# EAGLE board takpad6.2 (EAGLE 8.4.1)
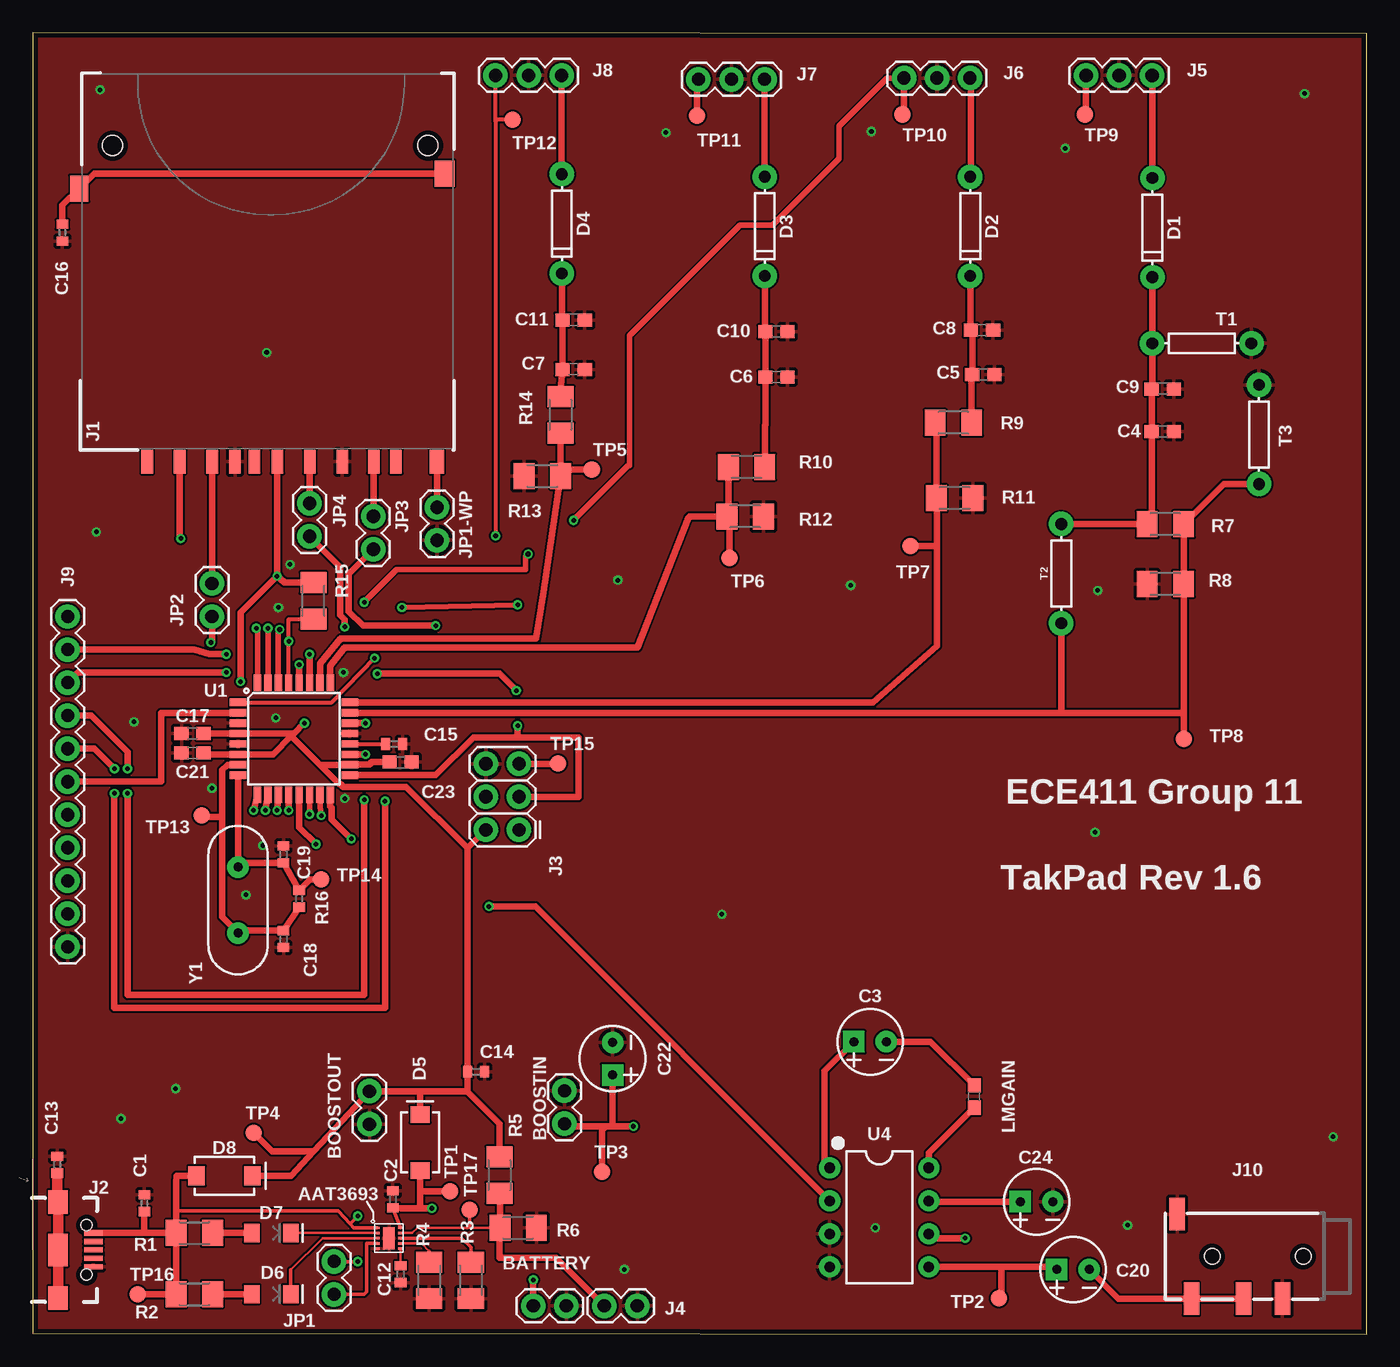
[diagram p0: board, top side]
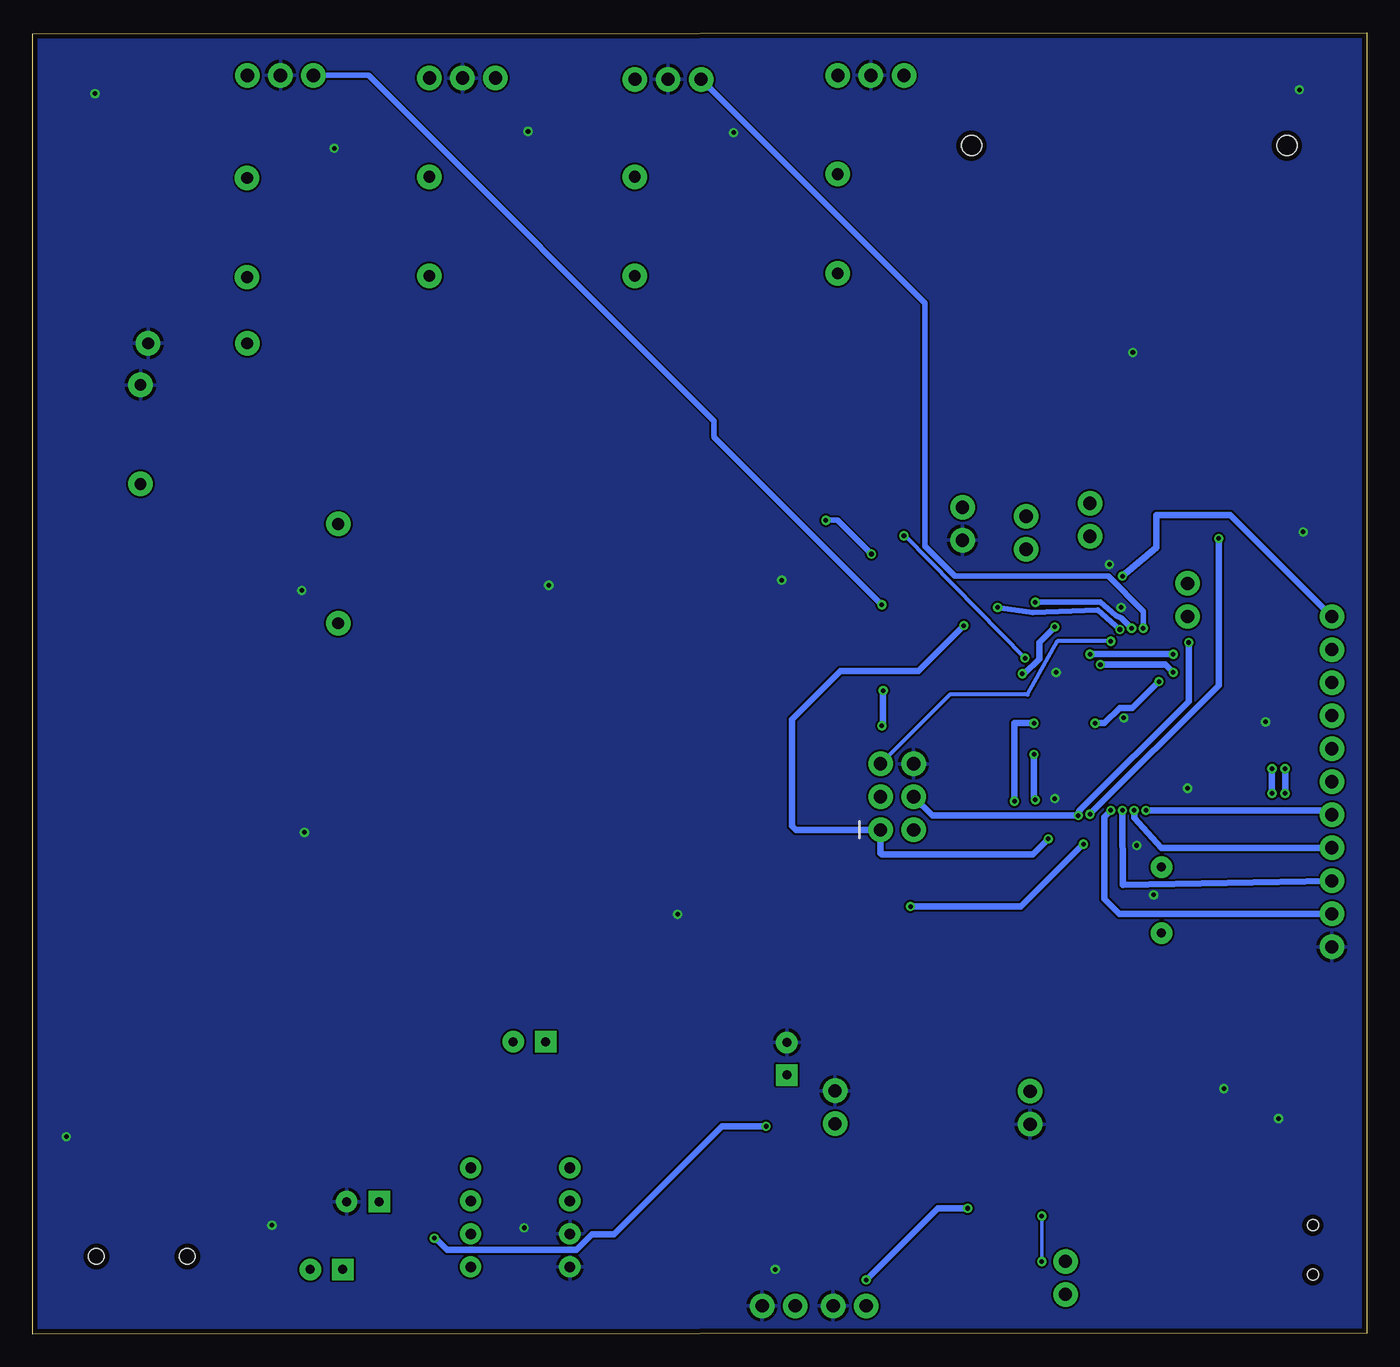
[diagram p1: board, bottom side, seen from below]

Size 102.6 x 100.1 mm. Coordinates in mm from the lower left corner, seen from the top.
Outline: 0,0.1 102.6,0 102.6,100 0,100.1 0,0.1
Copper layers (1*16): Top 0.0356mm / dielectric 1.5011mm / Bottom 0.0356mm
Design rules "LaenPCBOrder": minimum track width 6mil, minimum drill 13mil, track to track 6mil, track to pad 6mil, pad to pad 6mil, via to via 6mil, smd to smd 6mil, copper to edge 15mil, drill to drill 6mil, minimum pad ring 7mil, minimum via ring 7mil, stop-mask expansion 3mil, vias tented up to drill 0mil, thermal gap 10mil

## Footprints (pad centres in the part's own frame; a part is rotated, then mirrored left to right if it is on the bottom)
1X02 = drill 1.016 pad 1.88: 1 0,0; 2 2.54,0
C0402 = smd 0.7 x 0.9: 1 -0.65,0; 2 0.65,0
CPOL-RADIAL-2.5MM-5MM-KIT = drill 0.7 pad 1.651 square: 1 1.25,0 | drill 0.7 pad 1.651: 2 -1.25,0
0603 = smd 1.1 x 1: 1 -0.85,0; 2 0.85,0
DIODE-1N4148 = drill 0.9 pad 1.88: A -3.81,0; C 3.81,0
SMA-DIODE = smd 1.27 x 1.47: A -2.15,0; C 2.15,0
LED-1206 = smd 1.2 x 1.4: A -1.5,0; C 1.5,0
SD = smd 1.8 x 0.9: 1 -1,6.77; 2 -1,4.27; 3 -1,2.52; 4 -1,-0.73; 5 -1,-3.23; 6 -1,-5.73; 7 -1,-8.15; 8 -1,-9.85; 9 -1,9.27; CD -1,1.02 | smd 2 x 1.4: SH@1 20,14.496 | smd 2 x 1.527: SH@2 21.15,-13.589 | smd 1.8 x 1.1: WP -1,-13 | hole 1.55: 23.3,11.94; 23.3,-12.32
USB-B-MICRO-SMD_RED_PASTE = smd 1.45 x 0.4: D+ 2.725,0; D- 2.725,0.65; GND 2.725,-1.3; ID 2.725,-0.65; VBUS 2.725,1.3 | smd 1.5 x 1.8: SHIELD1 0,3.685; SHIELD2 0,-3.685 | smd 1.5 x 2.5: SHIELD3 0,0 | hole 0.85: 2.2,1.9; 2.2,-1.9
2X3 = drill 1.016 pad 1.88: 1 0,0; 2 0,2.54; 3 2.54,0; 4 2.54,2.54; 5 5.08,0; 6 5.08,2.54
1X03 = drill 1.016 pad 1.88: 1 0,0; 2 2.54,0; 3 5.08,0
1X11 = drill 1.016 pad 1.88: 1 0,0; 2 2.54,0; 3 5.08,0; 4 7.62,0; 5 10.16,0; 6 12.7,0; 7 15.24,0; 8 17.78,0; 9 20.32,0; 10 22.86,0; 11 25.4,0
AUDIO_JACK_3.5MM_TRRS_SMD_RA = smd 1.2 x 2.5: EARTH 11.3,-3.25; RING1 6.2,3.25; RING2 3.2,3.25; TIP 10.2,3.25 | hole 1.2: 1.6,0; 8.6,0
M1206 = smd 1.6 x 2: 1 -1.4,0; 2 1.4,0
R0402 = smd 0.7 x 0.9: 1 -0.65,0; 2 0.65,0
AXIAL-0.3 = drill 0.9 pad 1.88: P$1 -3.81,0; P$2 3.81,0
B1,27 = smd 1.27 x 1.27: TP 0,0
TQFP32-08 = smd 1.27 x 0.559: 1 -4.293,2.8; 2 -4.293,2; 3 -4.293,1.2; 4 -4.293,0.4; 5 -4.293,-0.4; 6 -4.293,-1.2; 7 -4.293,-2; 8 -4.293,-2.8; 17 4.293,-2.8; 18 4.293,-2; 19 4.293,-1.2; 20 4.293,-0.4; 21 4.293,0.4; 22 4.293,1.2; 23 4.293,2; 24 4.293,2.8 | smd 0.559 x 1.27: 9 -2.8,-4.293; 10 -2,-4.293; 11 -1.2,-4.293; 12 -0.4,-4.293; 13 0.4,-4.293; 14 1.2,-4.293; 15 2,-4.293; 16 2.8,-4.293; 25 2.8,4.293; 26 2,4.293; 27 1.2,4.293; 28 0.4,4.293; 29 -0.4,4.293; 30 -1.2,4.293; 31 -2,4.293; 32 -2.8,4.293
DIP08 = drill 0.813 pad 1.626: 1 -3.81,-3.81; 2 -1.27,-3.81; 3 1.27,-3.81; 4 3.81,-3.81; 5 3.81,3.81; 6 1.27,3.81; 7 -1.27,3.81; 8 -3.81,3.81
IDH-AA-T1 = smd 0.4 x 0.18: BAT 0.9,0.8; CT 0.9,-0.8; EN -0.9,-0.4; GND -0.9,-0.8; ISET 0.9,-0.4; STAT1 -0.9,0.4; STAT2 -0.9,0; TERM 0.9,0; TS 0.9,0.4; VIN -0.9,0.8 | smd 0.9 x 1.7: EP 0,0
HC49US = drill 0.7 pad 1.651: 1 -2.54,0; 2 2.54,0

## Placement (x,y rotation side)
BATTERY  [1X02]  41.04,2.2 180 top
BOOSTIN  [1X02]  40.9,16.2 90 top
BOOSTOUT  [1X02]  25.9,18.7 270 top
C1  10u  [C0402]  8.6,10.1 90 top
C2  10u  [C0402]  27.7,10.4 270 top
C3  10uF  [CPOL-RADIAL-2.5MM-5MM-KIT]  64.4,22.5 180 top
C4  47pF  [0603]  86.9,69.4 0 top
C5  47pF  [0603]  73.1,73.8 0 top
C6  47pF  [0603]  57.2,73.6 0 top
C7  47pF  [0603]  41.6,74.2 0 top
C8  1uF  [0603]  73,77.2 0 top
C9  1uF  [0603]  86.9,72.7 0 top
C10  1uF  [0603]  57.2,77.1 0 top
C11  1uF  [0603]  41.6,78 0 top
C12  0.1u  [C0402]  28.3,4.64 270 top
C13  0.1u  [C0402]  1.9,13.06 90 top
C14  10u  [C0402]  34.1,20.2 0 top
C15  0.1u  [C0402]  27.8,45.4 0 top
C16  0.1u  [C0402]  2.3,84.7 270 top
C17  1uF  [0603]  12.3,46.2 0 top
C18  22pF  [C0402]  19.3,30.4 90 top
C19  22pF  [C0402]  19.3,36.9 90 top
C20  10uF  [CPOL-RADIAL-2.5MM-5MM-KIT]  80,5 180 top
C21  1uF  [0603]  12.3,44.7 0 top
C22  10uF  [CPOL-RADIAL-2.5MM-5MM-KIT]  44.6,21.2 270 top
C23  1uF  [0603]  28.3,44 180 top
C24  0.1uF  [CPOL-RADIAL-2.5MM-5MM-KIT]  77.2,10.2 180 top
D1  200mA/100V/1V  [DIODE-1N4148]  86.1,85.1 270 top
D2  200mA/100V/1V  [DIODE-1N4148]  72.1,85.2 270 top
D3  200mA/100V/1V  [DIODE-1N4148]  56.3,85.2 270 top
D4  200mA/100V/1V  [DIODE-1N4148]  40.7,85.4 270 top
D5  2A/40V/360mV  [SMA-DIODE]  29.8,14.76 90 top
D6  RED  [LED-1206]  18.36,3.1 0 top
D7  GREEN  [LED-1206]  18.36,7.8 0 top
D8  2A/40V/360mV  [SMA-DIODE]  14.76,12.2 0 top
J1  SD_CARD_SOCKET  [SD]  18.09,68.1 90 top
J2  [USB-B-MICRO-SMD_RED_PASTE]  1.96,6.5 0 top
J3  AVR_SPI_PROG_3X2PTH  [2X3]  37.4,38.8 90 top
J4  [1X02]  43.96,2.2 0 top
J5  [1X03]  81,96.8 0 top
J6  [1X03]  67,96.6 0 top
J7  [1X03]  51.2,96.5 0 top
J8  [1X03]  35.6,96.8 0 top
J9  [1X11]  2.7,55.2 270 top
J10  AUDIO_JACK_TRRSSMD_RA  [AUDIO_JACK_3.5MM_TRRS_SMD_RA]  99.3,6 180 top
JP1  [1X02]  23.18,3.08 90 top
JP1-WP  [1X02]  31.1,63.6 270 top
JP2  [1X02]  13.8,55.2 90 top
JP3  [1X02]  26.2,62.9 270 top
JP4  [1X02]  21.3,63.9 270 top
LMGAIN  1  [0603]  72.4,18.3 90 top
R1  1.5k  [M1206]  12.44,7.8 180 top
R2  1.5k  [M1206]  12.44,3.1 180 top
R3  13.3k  [M1206]  33.7,4.16 90 top
R4  1.87k  [M1206]  30.5,4.16 90 top
R5  10k  [M1206]  35.9,12.26 90 top
R6  10k  [M1206]  37.34,8.2 180 top
R7  470k  [M1206]  87.1,62.3 0 top
R8  150k  [M1206]  87.1,57.7 0 top
R9  470k  [M1206]  70.8,70.1 0 top
R10  470k  [M1206]  54.9,66.7 0 top
R11  150k  [M1206]  70.9,64.3 0 top
R12  150k  [M1206]  54.8,62.9 0 top
R13  150k  [M1206]  39.2,66 180 top
R14  470k  [M1206]  40.6,70.7 90 top
R15  10k  [M1206]  21.6,56.4 270 top
R16  1M  [R0402]  20.5,33.5 270 top
T1  0  [AXIAL-0.3]  89.9,76.2 180 top
T2  0  [AXIAL-0.3]  79.1,58.5 90 top
T3  0  [AXIAL-0.3]  94.3,69.2 270 top
TP1  TPB1,27  [B1,27]  32.1,11 0 top
TP2  TPB1,27  [B1,27]  74.3,2.8 0 top
TP3  TPB1,27  [B1,27]  43.8,12.5 0 top
TP4  TPB1,27  [B1,27]  17,15.5 0 top
TP5  TPB1,27  [B1,27]  43,66.5 0 top
TP6  TPB1,27  [B1,27]  53.6,59.7 0 top
TP7  TPB1,27  [B1,27]  67.5,60.6 0 top
TP8  TPB1,27  [B1,27]  88.5,45.8 0 top
TP9  TPB1,27  [B1,27]  80.9,93.8 0 top
TP10  TPB1,27  [B1,27]  66.9,93.8 0 top
TP11  TPB1,27  [B1,27]  51.1,93.7 0 top
TP12  TPB1,27  [B1,27]  36.9,93.4 0 top
TP13  TPB1,27  [B1,27]  13,39.9 0 top
TP14  TPB1,27  [B1,27]  22.2,35 0 top
TP15  TPB1,27  [B1,27]  40.4,43.9 0 top
TP16  TPB1,27  [B1,27]  8.1,3.1 0 top
TP17  TPB1,27  [B1,27]  33.6,9.6 0 top
U1  ATMEGA328P_TQFP  [TQFP32-08]  20.1,45.8 0 top
U4  LM386N  [DIP08]  65.1,9 270 top
U$1  AAT3693  [IDH-AA-T1]  27.4,7.4 0 top
Y1  20MHz  [HC49US]  15.8,33.4 270 top

## Library data of the parts
BATTERY BOOSTIN BOOSTOUT J3-J9 = SparkFun-Connectors
C1 C2 C12-C16 R1-R16 = rcl
C3 C20 C22 C24 = SparkFun-Capacitors; PROD_ID: CAP-08440
C4-C11 C17 C21 C23 = SparkFun-Capacitors; PROD_ID: CAP-08913
C18 C19 = resistor
D1-D4 = SparkFun-DiscreteSemi; PROD_ID: DIO-08378
D5 D8 = SparkFun-DiscreteSemi; PROD_ID: DIO-09886
D6 = SparkFun-LED; PROD_ID: DIO-09912
D7 = SparkFun-LED; PROD_ID: DIO-00862
J1 = SparkFun-Connectors; PROD_ID: CONN-11976; SF_ID: PRT-12769
J2 = SparkFun-Connectors; PROD_ID: CONN-11752
J10 = SparkFun-Connectors; PROD_ID: CONN-10676; SF_ID: PRT-12639
JP1 JP1-WP JP2-JP4 = SparkFun-Retired
LMGAIN = SparkFun-Resistors; PROD_ID: RES-08269
T1-T3 = SparkFun-Resistors; PROD_ID: RES-12182
TP1-TP17 = testpad
U1 = SparkFun-IC-Microcontroller; PROD_ID: IC-09069
U4 = SparkFun-IC-Amplifiers; PROD_ID: IC-10899
U$1 = AAT3693
Y1 = SparkFun-Clocks; PROD_ID: XTAL-08181; SF_ID: COM-00536

## Nets
ADC4: J9.2 U1.27
ADC5: J9.3 U1.28
ADC6: J9.4 U1.19
ADC7: J9.5 U1.22
AREF: C15.1 U1.20
AUDIOINPUT: U1.13 U4.2
AUDIOOUT: C20.1 TP2.TP U4.5
BAT: BATTERY.2 C2.2 D5.A TP1.TP U$1.BAT
BYPASS: C24.1 U4.7
CD/DAT3: J1.1 U1.14
CLK: J1.5 JP4.1
CMD: J1.2 JP2.2
CT: C12.1 U$1.CT
DAT0: J1.7 JP3.1
EN: JP1.1 U$1.EN
GND: BATTERY.1 BOOSTIN.2 BOOSTOUT.2 C1.2 C2.1 C4.2 C5.2 C6.2 C7.2 C8.2 C9.2 C10.2 C11.2 C12.2 C13.2 C14.2 C15.2 C16.2 C17.1 C18.1 C19.2 C21.1 C22.2 C23.1 C24.2 J1.3 J1.6 J2.GND J3.6 J4.2 J5.2 J6.2 J7.2 J8.2 J9.11 J10.EARTH J10.RING2 JP1-WP.2 R3.1 R4.1 R6.1 R8.1 R11.2 R12.2 R13.2 T1.P$1 T3.P$1 U1.3 U1.5 U1.21 U4.3 U4.4 U$1.EP U$1.GND
ISET: R4.2 U$1.ISET
MISO: J3.1 JP3.2 U1.16
MOSI: J3.4 JP2.1 U1.15
N$1: C20.2 J10.RING1 J10.TIP
N$7: C13.1 J2.SHIELD1 J2.SHIELD2 J2.SHIELD3
N$9: C3.1 U4.1
N$10: C3.2 LMGAIN.2
N$11: LMGAIN.1 U4.8
N$17: C16.1 J1.SH@1 J1.SH@2
PB6: C18.2 R16.2 TP13.TP U1.7 Y1.2
PB7: C19.1 R16.1 TP14.TP U1.8 Y1.1
PD4: J9.6 U1.2
PD5: J9.7 U1.9
PD6: J9.8 U1.10
PD7: J9.9 U1.11
PD8: J9.10 U1.12
RST: J3.5 R15.2 TP15.TP U1.29
SCK: J3.3 JP4.2 U1.17
SENS1LED: J5.1 TP9.TP U1.30
SENS2LED: J6.1 TP10.TP U1.31
SENS3LED: J7.1 TP11.TP U1.32
SENS4LED: J8.1 TP12.TP U1.1
SENSOR1: D1.A J5.3
SENSOR1IN: C4.1 C9.1 D1.C R7.1 T1.P$2 T2.P$2
SENSOR1OUT: R7.2 R8.2 T2.P$1 T3.P$2 TP8.TP U1.23
SENSOR2: D2.A J6.3
SENSOR2IN: C5.1 C8.1 D2.C R9.2
SENSOR2OUT: R9.1 R11.1 TP7.TP U1.24
SENSOR3: D3.A J7.3
SENSOR3IN: C6.1 C10.1 D3.C R10.2
SENSOR3OUT: R10.1 R12.1 TP6.TP U1.25
SENSOR4: D4.A J8.3
SENSOR4IN: C7.1 C11.1 D4.C R14.2
SENSOR4OUT: R13.1 R14.1 TP5.TP U1.26
STAT1: D7.C U$1.STAT1
STAT1LED: D7.A R1.1
STAT2: D6.C U$1.STAT2
STAT2LED: D6.A R2.1
TEMPSENSE: J4.1 R5.1 R6.2 TP17.TP U$1.TS
TERM: R3.2 U$1.TERM
UPCONVERTERINPUT: BOOSTIN.1 C22.1 TP3.TP U4.6
V+: BOOSTOUT.1 C14.1 C17.2 C21.2 C23.2 D5.C D8.C J1.4 J3.2 J9.1 R5.2 R15.1 TP4.TP U1.4 U1.6 U1.18
VIN: C1.1 D8.A J2.VBUS JP1.2 R1.2 R2.2 TP16.TP U$1.VIN
WP: J1.WP JP1-WP.1

## Tracks (layer width: path | path; a pad name or v marks a point on that pad's centre or on a via)
ADC4  (via drill 0.35)
  Top 0.508: J9.2 12.44,52.66 13.6,52.3 v14.9,52.3 | U1.27 v21.3,52.3
  Bottom 0.508: v21.3,52.3 v14.9,52.3
ADC5  (via drill 0.35)
  Top 0.508: v14.9,50.9 3.48,50.9 J9.3 | U1.28 v20.5,51.5
  Bottom 0.508: v14.9,50.9 15.5,51.5 v20.5,51.5
ADC6  (via drill 0.35)
  Top 0.508: U1.19 v25.6,44.6 | v25.5,41.1 25.5,26.1 7.3,26.1 v7.3,41.6 | v7.3,43.5 7.3,44.8 4.52,47.58 J9.4
  Bottom 0.508: v25.6,44.6 25.6,41.2 v25.5,41.1 | v7.3,43.5 v7.3,41.6
ADC7  (via drill 0.35)
  Top 0.508: U1.22 v25.6,47 | v27.1,41 27.1,25.1 6.3,25.1 v6.3,41.6 | v6.3,43.5 4.76,45.04 J9.5
  Bottom 0.508: v25.6,47 27.1,47 v27.1,41 | v6.3,43.5 v6.3,41.6
AREF
  Top 0.305: U1.20 C15.1
AUDIOINPUT  (via drill 0.35)
  Top 0.508: U4.2 38.66,32.9 v35.1,32.9 | v21.8,37.7 20.5,39 U1.13
  Bottom 0.508: v21.8,37.7 26.6,32.9 v35.1,32.9
AUDIOOUT
  Top 0.508: U4.5 74.5,5.19 | 74.5,5.19 78.56,5.19 C20.1 | 74.5,5.19 74.5,3 TP2.TP
BAT  (via drill 0.35)
  Top 0.254: U$1.BAT C2.2
  Top 0.508: 29.8,11 29.8,9.7 | 29.8,11 D5.A | 29.8,9.7 28.35,9.7 C2.2 | v30.7,9.7 29.8,9.7 | v38.5,4.2 BATTERY.2 | TP1.TP 29.8,11
  Bottom 0.508: v30.7,9.7 33,9.7 v38.5,4.2
BYPASS
  Top 0.508: C24.1 68.98,10.2 U4.7
CD/DAT3  (via drill 0.35)
  Top 0.406: v21.3,40 U1.14
  Top 0.508: J1.1 11.32,61.28 v11.4,61.2
  Bottom 0.508: v11.4,61.2 11.4,49.9 v21.3,40
CLK
  Top 0.508: JP4.1 21.32,63.92 J1.5
CMD
  Top 0.508: J1.2 13.82,57.76 JP2.2
CT
  Top 0.203: U$1.CT C12.1
DAT0
  Top 0.508: JP3.1 26.24,62.94 J1.7
EN
  Top 0.254: JP1.1 25.48,3.08 25.7,3.3 25.7,7 U$1.EN
GND  (via drill 0.35)
  other vias: 18.7,47.4 13.8,42 19.8,59.2 53,32.3 45.5,5 18.9,55.9 81.9,57.2 62.9,57.6 45,58 18,75.5 100,15.2 64.8,8.2 84.2,8.4 11,18.9 6.8,16.6 48.7,92.4 64.5,92.5 79.4,91.2 16.4,33.8 17.7,37.6 7.8,47.1 4.9,61.7 97.8,95.4 5.2,95.7 23.9,50.9 24,41.2 81.7,38.6
  pour Top: 8.6,100 0.1,100.1 0.2,0.2 2.6,0.3 102.5,0.1 102.5,4.7 102.3,100 87.1,99.9
  pour Bottom: 0.1,100.1 0.1,0.2 8.7,0.3 102.4,0.1 102.5,0.8 102.3,99.9 5.7,100.1
ISET
  Top 0.203: U$1.ISET 29.9,7 30.5,6.4
  Top 0.254: 30.5,6.4 R4.2
MISO  (via drill 0.35)
  Top 0.508: U1.16 22.9,40.6 23,40.5 23,39.6 v24.5,38.1 | v31,54.5 25.4,54.5 24.3,55.6 24.3,58.46 JP3.2
  Bottom 0.508: v24.5,38.1 25.7,36.9 37.3,36.9 37.4,37 J3.1 43.9,38.8 44.2,39.1 44.2,47.3 40.5,51 34.5,51 v31,54.5
MOSI  (via drill 0.35)
  Top 0.406: v22.2,39.9 22.1,40.61 U1.15
  Top 0.508: JP2.1 13.8,53.3 v13.7,53.2
  Bottom 0.508: v13.7,53.2 13.7,48.67 22.06,40.31 22.16,40.14 v22.2,39.9 33.42,39.9 J3.4
N$1
  Top 0.508: J10.RING1 J10.TIP 83.5,2.75 C20.2
N$7
  Top 0.813: C13.1 1.9,11.03 J2.SHIELD1 J2.SHIELD3 J2.SHIELD2
N$9
  Top 0.508: C3.1 60.9,20.25 60.9,13.2 U4.1
N$10
  Top 0.508: C3.2 69.05,22.5 LMGAIN.2
N$11
  Top 0.508: U4.8 68.91,13.96 LMGAIN.1
N$17
  Top 0.508: C16.1 2.3,86.81 J1.SH@1 4.74,89.25 J1.SH@2
PB6
  Top 0.508: R16.2 C18.2 15.99,31.05 Y1.2 14.57,32.09 14.57,36.45 14.6,36.48 14.6,39.8 | 14.6,39.8 14.6,43.4 15,43.8 U1.7 | TP13.TP 13.1,39.8 14.6,39.8
PB7
  Top 0.508: U1.8 Y1.1 16.11,36.25 C19.1 R16.1 21.35,35 TP14.TP
PD4
  Top 0.508: J9.6 9.9,42.5 9.9,47.8 U1.2
PD5  (via drill 0.35)
  Top 0.508: U1.9 v17,40.3
  Bottom 0.508: v17,40.3 3.04,40.3 J9.7
PD6  (via drill 0.35)
  Top 0.508: U1.10 v17.9,40.3
  Bottom 0.508: v17.9,40.3 17.9,39.7 15.82,37.42 J9.8
PD7  (via drill 0.35)
  Top 0.508: U1.11 v18.8,40.3
  Bottom 0.508: v18.8,40.3 18.78,34.58 J9.9
PD8  (via drill 0.35)
  Top 0.508: U1.12 v19.7,40.3
  Bottom 0.508: v19.7,40.3 20.2,39.8 20.2,33.5 19.04,32.34 J9.10
RST  (via drill 0.35)
  Top 0.305: U1.29 v19.7,53.3 19.7,55 R15.2
  Top 0.508: TP15.TP 40.38,43.88 J3.5
  Bottom 0.305: v19.7,53.3 23.8,53.3 26.1,49.2 32.08,49.2 J3.5
SCK  (via drill 0.35)
  Top 0.508: U1.17 31,43 33.9,45.9 37.2,45.9 | 37.2,45.9 42,45.9 42,41.34 J3.3 | v24,54.4 24,54.97 23.64,55.33 23.64,59.02 JP4.2 | v37.3,46.8 37.3,46 37.2,45.9 | v26.5,50.8 35.9,50.8 v37.2,49.5
  Bottom 0.508: v24,54.4 25.2,53.2 25.2,51.95 25.22,51.91 26.33,50.8 v26.5,50.8 | v37.2,49.5 37.2,46.9 v37.3,46.8
SENS1LED  (via drill 0.35)
  Top 0.406: v19,54.2 18.9,54.1 U1.30 | v28.4,55.9 v37.3,56.1
  Top 0.508: J5.1 81,93.9 TP9.TP
  Bottom 0.406: v19,54.2 20.7,55.7 25.7,55.5 v28.4,55.9 | v37.3,56.1 50.2,69 50.2,70.23 76.78,96.8 J5.1
SENS2LED  (via drill 0.35)
  Top 0.406: U1.31 v18.1,54.3 | v25.5,56.3 28,58.8 37.9,58.8 37.9,59.8 v38.1,60 | J6.1 65.7,96.6 62,92.9 62,90.4 56.9,85.3 54.4,85.3 45.9,76.8 45.9,66.8 45.8,66.8 v41.6,62.6
  Top 0.508: J6.1 67,93.9 TP10.TP
  Bottom 0.406: v18.1,54.3 18.29,54.49 18.89,55.09 19.29,55.29 20.5,56.3 v25.5,56.3 | v38.1,60 40.7,62.6 v41.6,62.6
SENS3LED  (via drill 0.35)
  Top 0.406: v17.2,54.3 17.3,54.2 U1.32
  Top 0.508: TP11.TP 51.1,96.4 J7.1
  Bottom 0.406: v17.2,54.3 17.2,55.6 19.9,58.3 31.7,58.3 34,60.6 34,79.3 J7.1
SENS4LED  (via drill 0.35)
  Top 0.305: 35.6,93.3 J8.1 | 35.6,93.3 v35.6,61.4 | U1.1 23,48.6 v26.3,52 | TP12.TP 35.7,93.4 35.6,93.3
  Bottom 0.305: v35.6,61.4 35.5,61.4 v26.3,52
SENSOR1
  Top 0.508: D1.A 86.1,94.96 86.08,94.98 J5.3
SENSOR1IN
  Top 0.152: R7.1
  Top 0.508: D1.C T1.P$2 86.09,72.74 C9.1 C4.1 86.05,65.7 86.05,65.44 86.05,62.65 R7.1 | T2.P$2 R7.1
SENSOR1OUT
  Top 0.508: 79.1,47.8 88.3,47.8 88.5,48 | 79.1,47.8 U1.23 | T3.P$2 91.59,65.39 R7.2 R8.2 88.5,48 | TP8.TP 88.5,48 | T2.P$1 79.1,47.8
SENSOR2
  Top 0.508: 72.14,89.05 72.16,89.07 | 72.14,89.05 D2.A | J6.3 72.14,96.53 72.14,89.05
SENSOR2IN
  Top 0.508: D2.C 72.1,77.25 C8.1 72.25,77.1 C5.1 72.22,73.77 | 72.22,73.77 72.19,73.74 | R9.2 72.2,73.75 72.22,73.77
SENSOR2OUT
  Top 0.508: U1.24 64.6,48.6 69.52,52.92 69.52,60.5 | 69.52,60.5 69.52,64.28 R11.1 69.5,70 R9.1 | TP7.TP 69.42,60.6 69.52,60.5
SENSOR3
  Top 0.508: 56.26,89.05 D3.A 56.28,89.03 J7.3
SENSOR3IN
  Top 0.508: D3.C 56.3,77.15 C10.1 C6.1 56.35,69.94 56.3,69.89 R10.2
SENSOR3OUT
  Top 0.406: 53.29,62.79 R12.1 | 53.4,66.6 R10.1
  Top 0.508: U1.25 22.9,51.4 24,52.8 46.53,52.8 50.42,62.79 50.53,62.9 R12.1 53.45,62.95 | R10.1 53.5,63 53.45,62.95 | TP6.TP 53.6,62.8 53.45,62.95
SENSOR4
  Top 0.508: D4.A 40.66,89.25 40.68,89.27 J8.3
SENSOR4IN
  Top 0.508: D4.C 40.7,78.05 C11.1 C7.1 40.65,73 R14.2
SENSOR4OUT
  Top 0.508: U1.26 22.1,51.6 23.7,53.5 38.7,53.5 39.3,57.1 R13.1 | R13.1 R14.1 | TP5.TP 41.1,66.5 R13.1
STAT1
  Top 0.203: D7.C U$1.STAT1
STAT1LED
  Top 0.508: R1.1 D7.A
STAT2
  Top 0.203: U$1.STAT2 22.3,7.4 19.86,4.96
  Top 0.254: 19.86,4.96 D6.C
STAT2LED
  Top 0.508: R2.1 D6.A
TEMPSENSE
  Top 0.203: R6.2 33.4,8.2 29.6,8.2 29.2,7.8 28.32,7.8 | 28.32,7.8 U$1.TS | U$1.TS 28.32,7.8
  Top 0.254: 33.4,8.2 33.6,8.4 TP17.TP
  Top 0.508: 35.8,10.76 R5.1 35.94,10.82 R6.2 35.9,8.16 35.9,5.9 40.26,5.9 J4.1
TERM
  Top 0.254: U$1.TERM 33,7.4 33.7,6.7 R3.2
UPCONVERTERINPUT  (via drill 0.35)
  Top 0.508: 44.6,16 v46.2,16 | 44.6,16 44.1,16 | 44.1,16 41.1,16 BOOSTIN.1 | v71.7,7.4 69.24,7.4 U4.6 | 44.1,16 43.8,15.7 TP3.TP | C22.1 44.6,16
  Bottom 0.508: v46.2,16 49.6,16 57.9,7.7 59.6,7.7 60.78,6.51 70.73,6.51 71.62,7.4 v71.7,7.4
V+  (via drill 0.35)
  Top 0.508: D8.C 19.9,12.2 21.63,14.08 | 21.63,14.08 BOOSTOUT.1 29.8,18.7 | 29.8,18.7 D5.C | 33.4,18.7 29.8,18.7 | 33.4,18.7 35.9,16.2 R5.2 | 33.4,18.7 33.45,18.75 C14.1 33.45,37.39 | 33.45,37.39 J3.2 | 33.45,37.39 28.74,42.1 23.9,42.1 23.69,42.31 23.59,42.31 22.1,43.8 | 22.1,43.8 19.9,46 | 19.9,46 19.7,46.2 | J1.4 18.82,60.58 v18.8,58.3 | v20.9,47 20.1,46.2 19.7,46.2 | R15.1 19.4,57.8 v18.8,58.3 | v16,50.2 16,55.5 v18.8,58.3 | 19.7,46.2 U1.4 C17.2 | 19.9,46 18.5,44.6 U1.6 13.25,44.6 C21.2 | 21.63,14.08 18.42,14.08 TP4.TP | 22.1,43.8 U1.18 24.43,43.84 25.91,43.84 26.07,44 C23.2
  Bottom 0.508: v18.8,58.3 16.2,60.5 16.2,63 10.5,63 J9.1 | v20.9,47 20.17,47 19.01,48.16 18.04,48.16 v16,50.2
VIN  (via drill 0.35)
  Top 0.254: U$1.VIN 24.7,8.2 24.4,8.5 | 24.4,8.5 23.5,9.5 11.1,9.5 | JP1.2 23.2,5.6 v25,5.6 | v25,9.1 24.4,8.5
  Top 0.508: 8.7,7.8 R1.2 | 8.7,7.8 J2.VBUS | R1.2 R2.2 TP16.TP | C1.1 8.6,7.9 8.7,7.8 | R1.2 11.04,9.34 | 11.04,9.34 11.1,9.5 | 11.04,9.34 11.04,11.74 11.1,12.2 D8.A
  Bottom 0.254: v25,5.6 v25,9.1
WP
  Top 0.508: JP1-WP.1 J1.WP

## Text on the board
tPlace: ECE411 Group 11 | TakPad Rev 1.6
tNames: AAT3693